# EAGLE board Power-Monitor-Module-Panel (EAGLE 9.6.2)
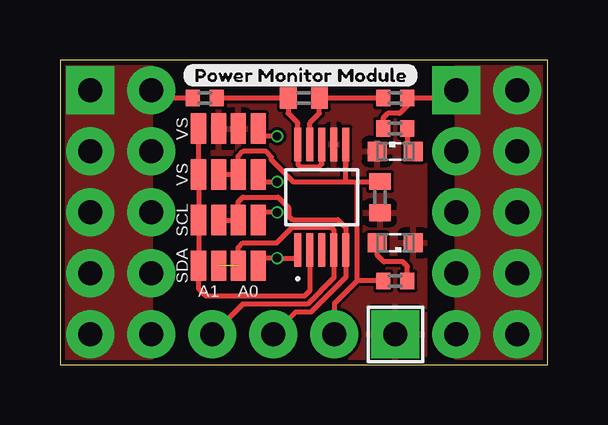
[diagram p0: board, top side]
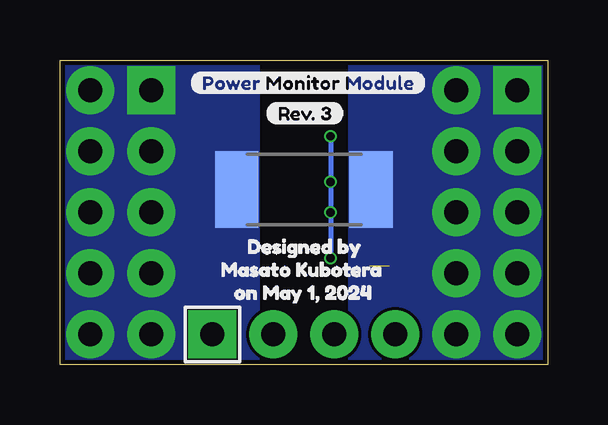
[diagram p1: board, bottom side, seen from below]

Size 20.32 x 12.7 mm. Coordinates in mm from the lower left corner, seen from the top.
Outline: 0,0 20.32,0 20.32,12.7 0,12.7 0,0
Copper layers (1*16): Top 0.035mm / dielectric 1.6mm / Bottom 0.035mm
Design rules "jlcpcb-2layers": minimum track width 5mil, minimum drill 0.3mm, track to track 5mil, track to pad 5mil, pad to pad 5mil, via to via 5mil, smd to smd 5mil, copper to edge 0.2mm, drill to drill 6mil, minimum pad ring 10mil, minimum via ring 3mil, stop-mask expansion 4mil, vias tented up to drill 0mil, thermal gap 10mil
Net classes: 1 data: width 0.152 mm; 2 power: width 0.203 mm; 6 low_power: width 0.203 mm, clearance 0.127 mm

## Footprints (pad centres in the part's own frame; a part is rotated, then mirrored left to right if it is on the bottom)
C0402 = smd 0.7 x 0.9: 1 -0.65,0; 2 0.65,0
MSOP-10 = smd 1.4 x 0.3: 1 -2.2,1; 2 -2.2,0.5; 3 -2.2,0; 4 -2.2,-0.5; 5 -2.2,-1; 6 2.2,-1; 7 2.2,-0.5; 8 2.2,0; 9 2.2,0.5; 10 2.2,1
SHORTLAND = smd 0.635 x 1.27: 1 -0.419,0; 2 0.419,0
SML0603 = smd 0.8 x 0.8: A 0.75,0; C -0.75,0
2X5P = drill 1 pad 2 square: 1 -1.27,5.08 | drill 1 pad 2: 2 -1.27,2.54; 3 -1.27,0; 4 -1.27,-2.54; 5 -1.27,-5.08; 6 1.27,-5.08; 7 1.27,-2.54; 8 1.27,0; 9 1.27,2.54; 10 1.27,5.08
1X4P = drill 1 pad 2 square: 1 0,3.81 | drill 1 pad 2: 2 0,1.27; 3 0,-1.27; 4 0,-3.81
R2512 = smd 1.8 x 3.2: 1 -2.8,0; 2 2.8,0
R0402 = smd 0.6 x 0.7: 1 -0.5,0; 2 0.5,0

## Placement (x,y rotation side)
C1  0.1u  [C0402]  10.16,11.11 0 top
C2  0.1u  [C0402]  13.34,6.98 270 top
IC1  INA226  [MSOP-10]  10.91,6.98 90 top
JP1  SHORTLAND  [SHORTLAND]  6.19,9.84 0 top
JP2  SHORTLAND  [SHORTLAND]  6.19,7.94 0 top
JP3  SHORTLAND  [SHORTLAND]  6.19,4.13 0 top
JP4  SHORTLAND  [SHORTLAND]  6.19,6.03 0 top
JP5  SHORTLAND  [SHORTLAND]  7.84,9.84 180 top
JP6  SHORTLAND  [SHORTLAND]  7.84,7.94 180 top
JP7  SHORTLAND  [SHORTLAND]  7.84,4.13 180 top
JP8  SHORTLAND  [SHORTLAND]  7.84,6.03 180 top
LED1  Red  [SML0603]  13.97,8.89 0 top
LED2  Yellow  [SML0603]  13.97,5.08 180 top
P1  2X5P  [2X5P]  2.54,6.35 0 top
P2  2X5P  [2X5P]  17.78,6.35 0 top
P3  1X4P  [1X4P]  10.16,1.27 270 top
R1  0.002  [R2512]  10.16,7.3 0 bottom
R2  4.7  [R0402]  6.03,11.11 0 top
R3  4.7  [R0402]  13.97,11.11 180 top
R4  2k  [R0402]  13.97,9.84 180 top
R5  2k  [R0402]  13.97,3.49 180 top
U$1  [POWER_MONITOR_MODULE]  5.08,12.06 0 top
U$2  [POWER_MONITOR_MODULE]  14.92,11.75 0 bottom
U$3  [REV#_3]  11.75,10.48 0 bottom
U$5  [DESIGNED_BY_MASATO_KUBOTERA_ON_MAY_1-0.0225]  10.16,3.97 0 bottom

## Library data of the parts
C1 C2 = rcl; SPICEPREFIX: C
IC1 = INA226
JP1-JP8 = Shortland
LED1 LED2 = led
P1-P3 = Pinheader
R1-R5 = rcl; SPICEPREFIX: R
U$1-U$3 U$5 = buzzard_labels

## Nets
A0 [data]: IC1.2 JP1.1 JP2.1 JP3.1 JP4.1
A1 [data]: IC1.1 JP5.1 JP6.1 JP7.1 JP8.1
ALERT [data]: IC1.3
GND [power]: C2.2 IC1.7 JP1.2 JP5.2 LED1.C LED2.C P3.1
IN+ [power]: C1.1 IC1.8 IC1.10 R2.2
IN- [power]: C1.2 IC1.9 R3.2
LED1_: LED1.A R4.1
LED2: LED2.A R5.1
SCL [data]: IC1.5 JP4.2 JP8.2 P3.3
SDA [data]: IC1.4 JP3.2 JP7.2 P3.4
VIN+: P1.1 P1.2 P1.3 P1.4 P1.5 P1.6 P1.7 P1.8 P1.9 P1.10 R1.2 R2.1
VIN-: P2.1 P2.2 P2.3 P2.4 P2.5 P2.6 P2.7 P2.8 P2.9 P2.10 R1.1 R3.1 R4.2
VS [power]: C2.1 IC1.6 JP2.2 JP6.2 P3.2 R5.2

## Tracks (layer width: path | path; a pad name or v marks a point on that pad's centre or on a via)
A0
  Top 0.203: JP1.1 JP2.1 JP4.1 JP3.1 5.77,3.17 6.09,2.86 10.18,2.86 10.41,3.09 IC1.2
A1  (via drill 0.35)
  Top 0.203: JP7.1 8.26,4.44 v9.05,4.44 9.91,4.44 IC1.1 | v9.05,6.35 8.26,6.35 JP8.1 | v9.05,9.52 8.26,9.52 JP5.1 | JP6.1 8.26,7.62 v9.05,7.62
  Bottom 0.203: v9.05,4.44 v9.05,6.35 v9.05,7.62 v9.05,9.52
GND
  pour Top: 6.35,12.7 6.35,0 15.24,0 15.24,12.7
IN+
  Top 0.203: R2.2 C1.1 9.51,10.48 9.91,10.08 IC1.10 9.91,8.35 10,8.25 10.79,8.25 10.91,8.37 IC1.8
IN-
  Top 0.203: IC1.9 10.41,10.08 10.81,10.48 C1.2 R3.2
LED1_
  Top 0.203: R4.1 14.47,9.14
  Top 0.254: 14.47,9.14 LED1.A
LED2
  Top 0.203: R5.1 14.47,4.1 14.29,4.29 13.49,4.29 13.22,4.56 LED2.A
SCL
  Top 0.203: JP4.2 JP8.2 7.42,6.79 7.62,6.98 9.09,6.98 9.53,6.55 9.53,6.2 9.68,6.04 11.58,6.04 11.91,5.71 IC1.5 11.91,3.65 10.45,2.2 9.82,2.2 P3.3
SDA  (1 unrouted)
  Top 0.203: P3.4 7.61,2.53 10.31,2.53 11.41,3.62 IC1.4 11.41,5.62 11.31,5.71 9.67,5.71 9.03,5.08 7.62,5.08 7.42,4.88 JP7.2
VIN+
  Top 0.203: R2.1 4.13,11.11 P1.10
  pour Bottom (no thermals): 0,12.7 0,0 8.26,0 8.26,12.7
  pour Top (no thermals): 0,12.7 0,0 3.81,0 3.81,12.7
VIN-
  Top 0.203: P2.1 16.19,11.11 R3.1 14.47,10.79 14.15,10.48 13.65,10.48 13.47,10.29 R4.2
  pour Bottom (no thermals): 12.06,12.7 12.06,0 20.32,0 20.32,12.7
  pour Top (no thermals): 16.51,12.7 16.51,0 20.32,0 20.32,12.7
VS
  Top 0.203: 11.91,8.23 IC1.6 11.91,7.63 11.89,7.62 | 12.38,3.49 11.43,2.54 P3.2 | R5.2 12.38,3.49 | JP2.2 JP6.2 7.42,8.69 7.62,8.89 8.59,8.89 8.81,8.67 8.81,8.54 9.73,7.62 11.89,7.62 | 13,7.62 13.18,7.79 C2.1 13.32,7.62 12.38,7.62 | 11.89,7.62 12.38,7.62 | 12.38,3.49 12.38,7.62

## Text on the board
tPlace: VS | VS | SCL | SDA | A1 | A0